# EAGLE board gnublin_ext_ssd1963 (EAGLE 6.3)
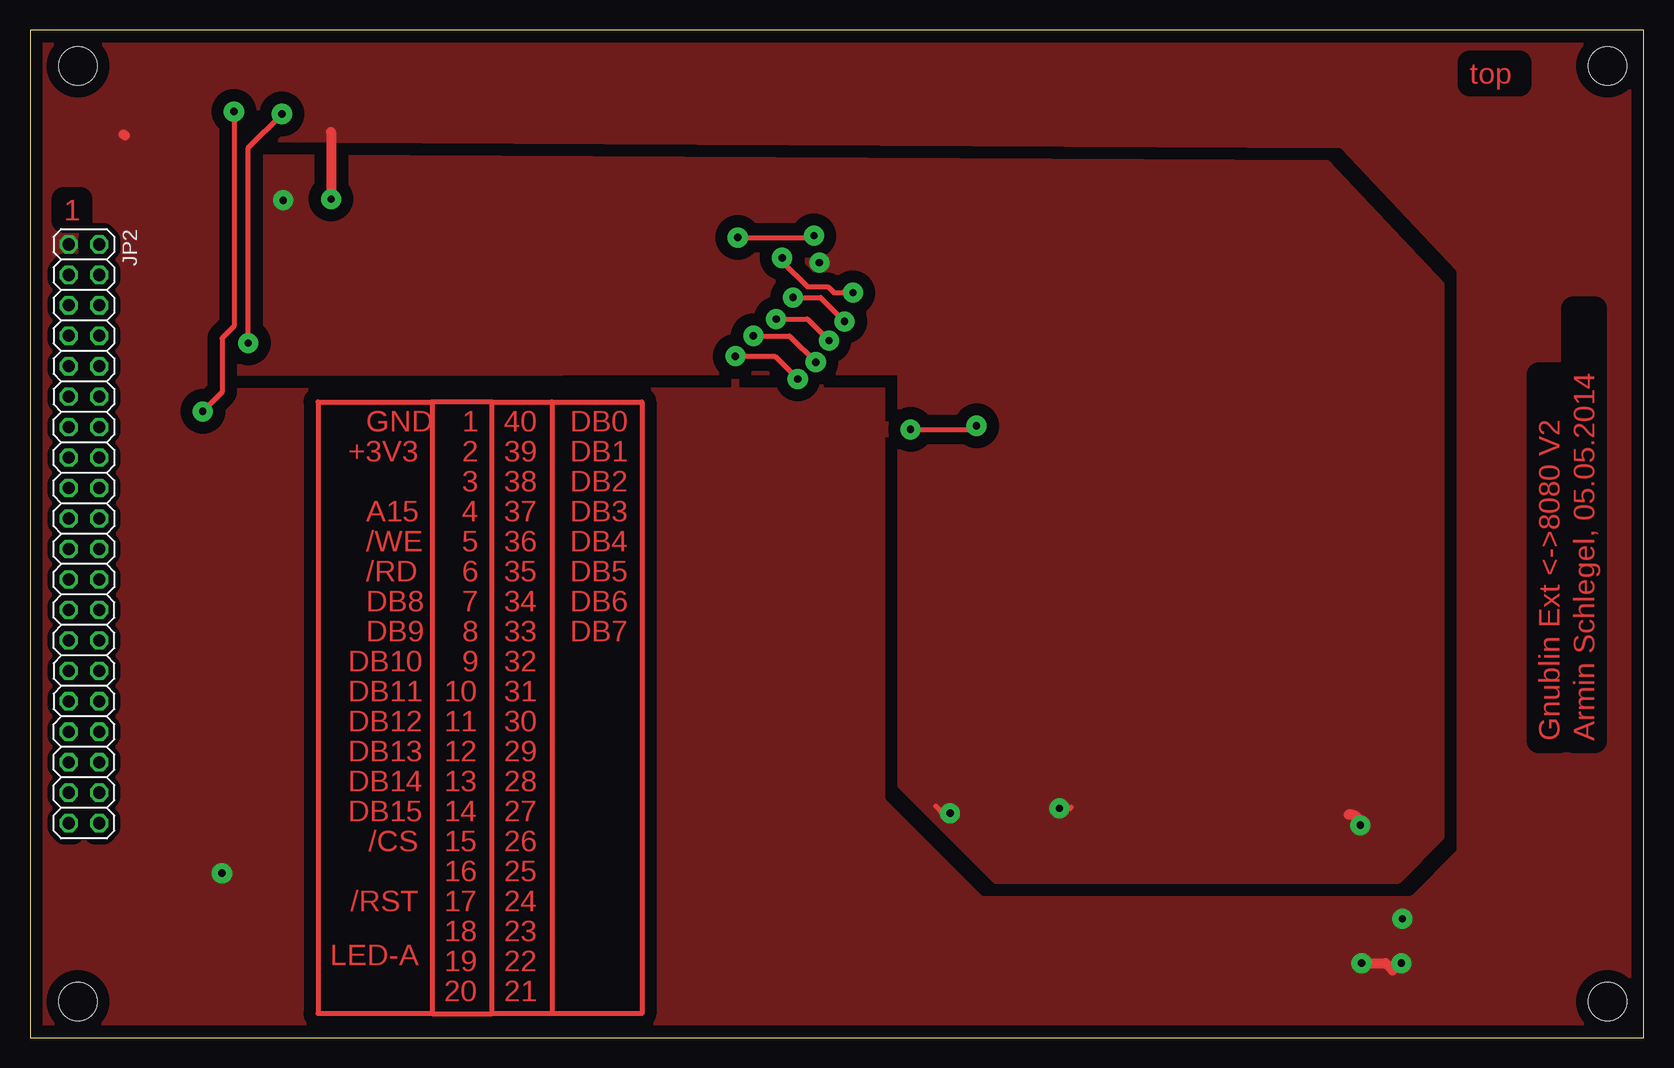
[diagram p0: board, top side]
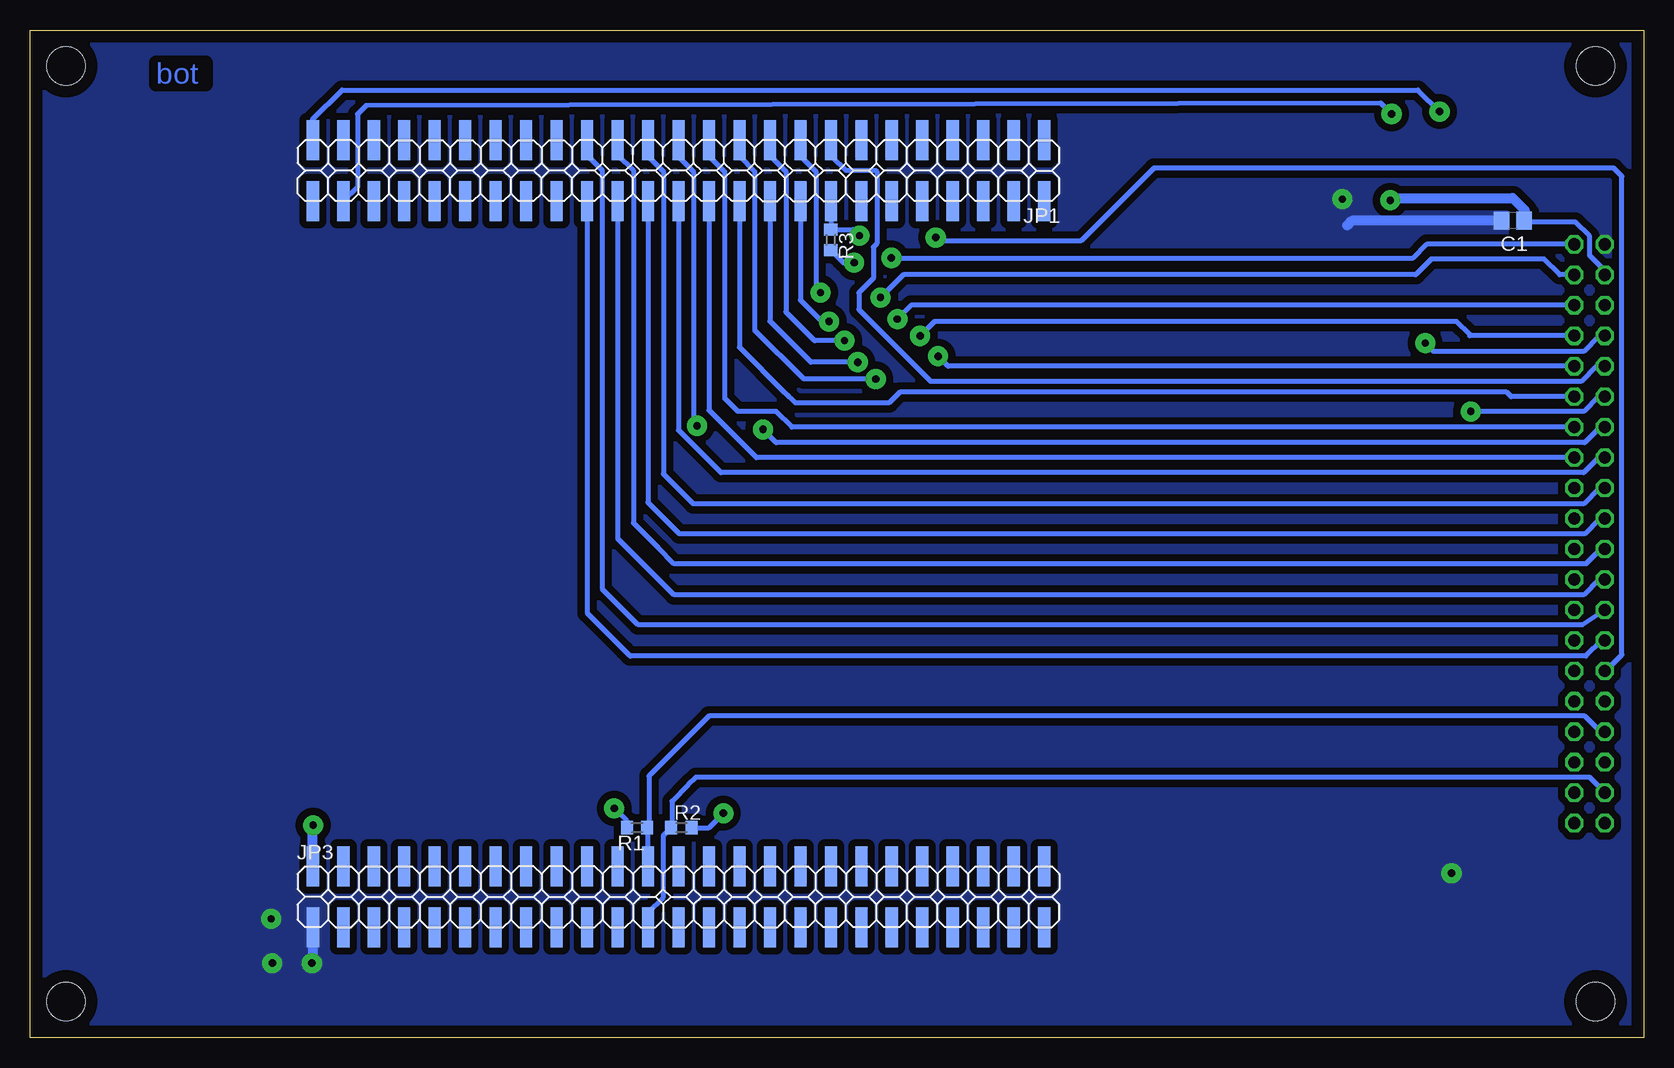
[diagram p1: board, bottom side, seen from below]

Size 134.5 x 84 mm. Coordinates in mm from the lower left corner, seen from the top.
Outline: 134.5,0 134.5,84 0,84 0,0 134.5,0
Copper layers (1*16): Top 0.035mm / dielectric 1.5mm / Bottom 0.035mm
Design rules "default": minimum track width 10mil, minimum drill 24mil, track to track 8mil, track to pad 8mil, pad to pad 8mil, via to via 8mil, smd to smd 8mil, copper to edge 40mil, drill to drill 8mil, minimum pad ring 10mil, minimum via ring 8mil, stop-mask expansion 4mil, vias tented up to drill 0mil, thermal gap 10mil
Net classes: 0 default: width 0.254 mm, drill 0.7 mm, clearance 0.254 mm
Holes 3.2 mm at 4,3 4,81 131.5,81 131.5,3

## Footprints (pad centres in the part's own frame; a part is rotated, then mirrored left to right if it is on the bottom)
C0805 = smd 1.3 x 1.5: 1 -0.95,0; 2 0.95,0
2X25SMD = smd 1.016 x 3.302: 1 -1.27,-3.81; 2 -1.27,1.27; 3 1.27,-3.81; 4 1.27,1.27; 5 3.81,-3.81; 6 3.81,1.27; 7 6.35,-3.81; 8 6.35,1.27; 9 8.89,-3.81; 10 8.89,1.27; 11 11.43,-3.81; 12 11.43,1.27; 13 13.97,-3.81; 14 13.97,1.27; 15 16.51,-3.81; 16 16.51,1.27; 17 19.05,-3.81; 18 19.05,1.27; 19 21.59,-3.81; 20 21.59,1.27; 21 24.13,-3.81; 22 24.13,1.27; 23 26.67,-3.81; 24 26.67,1.27; 25 29.21,-3.81; 26 29.21,1.27; 27 31.75,-3.81; 28 31.75,1.27; 29 34.29,-3.81; 30 34.29,1.27; 31 36.83,-3.81; 32 36.83,1.27; 33 39.37,-3.81; 34 39.37,1.27; 35 41.91,-3.81; 36 41.91,1.27; 37 44.45,-3.81; 38 44.45,1.27; 39 46.99,-3.81; 40 46.99,1.27; 41 49.53,-3.81; 42 49.53,1.27; 43 52.07,-3.81; 44 52.07,1.27; 45 54.61,-3.81; 46 54.61,1.27; 47 57.15,-3.81; 48 57.15,1.27; 49 59.69,-3.81; 50 59.69,1.27
2X20 = drill 1.016 octagon: 1 -24.13,-1.27; 2 -24.13,1.27; 3 -21.59,-1.27; 4 -21.59,1.27; 5 -19.05,-1.27; 6 -19.05,1.27; 7 -16.51,-1.27; 8 -16.51,1.27; 9 -13.97,-1.27; 10 -13.97,1.27; 11 -11.43,-1.27; 12 -11.43,1.27; 13 -8.89,-1.27; 14 -8.89,1.27; 15 -6.35,-1.27; 16 -6.35,1.27; 17 -3.81,-1.27; 18 -3.81,1.27; 19 -1.27,-1.27; 20 -1.27,1.27; 21 1.27,-1.27; 22 1.27,1.27; 23 3.81,-1.27; 24 3.81,1.27; 25 6.35,-1.27; 26 6.35,1.27; 27 8.89,-1.27; 28 8.89,1.27; 29 11.43,-1.27; 30 11.43,1.27; 31 13.97,-1.27; 32 13.97,1.27; 33 16.51,-1.27; 34 16.51,1.27; 35 19.05,-1.27; 36 19.05,1.27; 37 21.59,-1.27; 38 21.59,1.27; 39 24.13,-1.27; 40 24.13,1.27
R0603 = smd 1 x 1.1: 1 -0.85,0; 2 0.85,0

## Placement (x,y rotation side)
C1  100n  [C0805]  10.9,68.1 180 bottom
JP1  [2X25SMD]  51.23,71 180 bottom
JP2  [2X20]  4.5,42 270 top
JP3  [2X25SMD]  109.65,13 0 bottom
R1  10k  [R0603]  83.9,17.5 180 bottom
R2  10k  [R0603]  80.2,17.5 0 bottom
R3  10k  [R0603]  67.75,66.5 270 bottom

## Library data of the parts
C1 R1-R3 = rcl
JP1 JP3 = pinhead_smd
JP2 = pinhead

## Nets
+3V3: C1.1 JP2.3 JP3.2 R1.2 R2.2 R3.2
GND: C1.2 JP2.1 JP3.1
GPIO19: JP2.33 JP3.24 R1.1
GPIO20: JP2.37 JP3.23 R2.1
LPC_A15: JP1.48 JP2.7
LPC_DB0: JP1.17 JP2.2
LPC_DB1: JP1.18 JP2.4
LPC_DB2: JP1.19 JP2.6
LPC_DB3: JP1.20 JP2.8
LPC_DB4: JP1.21 JP2.10
LPC_DB5: JP1.22 JP2.12
LPC_DB6: JP1.23 JP2.14
LPC_DB7: JP1.24 JP2.16
LPC_DB8: JP1.25 JP2.13
LPC_DB9: JP1.26 JP2.15
LPC_DB10: JP1.27 JP2.17
LPC_DB11: JP1.28 JP2.19
LPC_DB12: JP1.29 JP2.21
LPC_DB13: JP1.30 JP2.23
LPC_DB14: JP1.31 JP2.25
LPC_DB15: JP1.32 JP2.27
LPC_DQM0: JP1.49 JP2.11
LPC_WE: JP1.15 JP2.9
STCS0: JP1.16 JP2.29 R3.1

## Tracks (layer width: path | path; a pad name or v marks a point on that pad's centre or on a via)
+3V3  (via drill 0.6 pad 1.68)
  Top 0.4: v76.7,18.7 76.1,18.7 75.5,19.3 | v85.8,19.1 86.7,19.1 86.8,19.2
  Top 0.813: v110.9,17.7 arc90 110,18.6 109.9,18.6
  Bottom 0.4: R3.2 67.2,65.1 66.9,64.8 66.7,64.6 v65.8,64.6 | R2.2 77.9,17.5 v76.7,18.7 | R1.2 84.75,18.05 v85.8,19.1
  Bottom 0.406: JP2.3 3.23,63.93 4.5,65.2 4.5,66.8 5.7,68 9.85,68 C1.1
  Bottom 0.813: JP3.2 110.92,17.68 v110.9,17.7 | v21.1,69.8 arc90 20.9,70 10.9,70 9.9,69 9.9,68.15 C1.1
  pour Top (isolate 1.016, rank 2, no thermals): 114,13 80.5,13 72.5,21 72.5,55.4 16.3,55.3 16.3,73.5 108.1,73 117.7,62.8 117.7,16.7
GND  (via drill 0.6 pad 1.68)
  Top 0.813: v111,6.2 113,6.2 113.6,5.6 | 7.9,75.2 7.8,75.3 | 25.1,75.5 v25.1,69.9
  Bottom 0.813: JP3.1 110.92,6.28 v111,6.2 | C1.2 24.3,68.1 24.7,67.7
  other vias: 114.4,9.9 114.3,6.2 16,13.7
  pour Bottom (isolate 0.61, no thermals): -0.17,-0.23 -0.17,83.54 134.71,84.64 134.71,-0.13
  pour Top (isolate 1.016, rank 3, no thermals): -1.37,-1.13 -1.97,84.94 135.51,84.74 134.41,0.07
GPIO19
  Bottom 0.406: JP3.24 82.98,17.43 R1.1 82.9,17.65 82.9,21.8 77.9,26.8 4.9,26.8 3.73,25.63 JP2.33
GPIO20
  Bottom 0.4: JP2.37 3.23,20.43 4.5,21.7 79,21.7 79.65,21.05
  Bottom 0.406: JP3.23 82.98,10.42 81.7,11.7 81.7,16.85 R2.1 81,17.55 81,19.7 79.65,21.05
LPC_A15  (via drill 0.6 pad 1.68)
  Top 0.406: v18.2,57.9 18.2,74.2 v21,77
  Bottom 0.406: JP2.7 3.73,58.47 5,57.2 17.5,57.2 v18.2,57.9 | v21,77 21.9,77.9 106.5,77.7 107.2,77 107.2,70.91 JP1.48
LPC_DB0  (via drill 0.6 pad 1.68)
  Top 0.4: v62.7,65 62.7,64.7 64.8,62.6 66.5,62.6 67,62.1 67.7,62.1
  Top 0.406: v68.6,62.1 67.7,62.1
  Bottom 0.406: JP1.17 70.28,73.48 69,72.2 69,62.5 v68.6,62.1 | JP2.2 18.07,66.13 19.2,65 v62.7,65
LPC_DB1  (via drill 0.6 pad 1.68)
  Top 0.406: v63.6,61.7 65.9,61.7 v67.9,59.7
  Bottom 0.406: JP1.18 70.28,61.48 68.5,59.7 v67.9,59.7 | v63.6,61.7 61.7,63.6 19,63.6 17.7,64.9 8.3,64.9 6.99,63.59 JP2.4
LPC_DB2  (via drill 0.6 pad 1.68)
  Top 0.406: v62.2,59.9 64.8,59.9 v66.6,58.1
  Bottom 0.406: JP1.19 72.82,73.52 71.5,72.2 71.5,60.5 69.1,58.1 v66.6,58.1 | JP2.6 61.05,61.05 v62.2,59.9
LPC_DB3  (via drill 0.6 pad 1.68)
  Top 0.406: v60.3,58.5 63.3,58.5 v65.5,56.3
  Bottom 0.406: JP1.20 72.82,59.72 69.4,56.3 v65.5,56.3 | JP2.8 14.49,58.51 14.49,58.59 15.6,59.7 59.1,59.7 v60.3,58.5
LPC_DB4  (via drill 0.6 pad 1.68)
  Top 0.406: v58.8,56.8 62.1,56.8 v64,54.9
  Bottom 0.406: JP1.21 75.36,73.46 74.1,72.2 74.1,59 70,54.9 v64,54.9 | JP2.10 57.97,55.97 v58.8,56.8
LPC_DB5
  Bottom 0.4: JP2.12 11.03,53.43 11.4,53.8 62,53.8 62.9,52.9 70.7,52.9 71.55,53.75
  Bottom 0.406: JP1.22 75.36,57.56 71.55,53.75 71.23,53.43
LPC_DB6
  Bottom 0.406: JP1.23 77.9,73.5 76.6,72.2 76.6,53.3 75.5,52.2 72.3,52.2 70.99,50.89 JP2.14
LPC_DB7
  Bottom 0.406: JP1.24 77.9,52.3 73.95,48.35 JP2.16
LPC_DB8  (via drill 0.6 pad 1.68)
  Top 0.406: v73.4,50.7 78.6,50.7 v78.9,51
  Bottom 0.406: JP1.25 80.44,73.44 79.2,72.2 79.2,51.3 v78.9,51 | JP2.13 3.73,50.77 4.9,49.6 72.3,49.6 v73.4,50.7
LPC_DB9
  Bottom 0.406: JP1.26 80.44,50.64 76.9,47.1 5,47.1 3.75,48.35 JP2.15
LPC_DB10
  Bottom 0.406: JP1.27 82.98,73.48 81.7,72.2 81.7,47 79.2,44.5 5,44.5 3.73,45.77 JP2.17
LPC_DB11
  Bottom 0.406: JP1.28 82.98,44.62 80.36,42 4.9,42 3.73,43.17 JP2.19
LPC_DB12
  Bottom 0.4: JP2.21 3.57,40.73 4.8,39.5 80.8,39.5 82.1,40.8
  Bottom 0.406: JP1.29 85.52,73.62 84.2,72.3 84.2,42.9 82.1,40.8
LPC_DB13
  Bottom 0.406: JP1.30 85.52,41.62 80.8,36.9 5,36.9 3.73,38.17 JP2.23
LPC_DB14
  Bottom 0.406: JP1.31 88.06,73.56 86.8,72.3 86.8,37.4 83.8,34.4 5.1,34.4 JP2.25
LPC_DB15
  Bottom 0.4: JP2.27 3.49,33.11 4.8,31.8 84.46,31.8 84.93,32.27
  Bottom 0.406: JP1.32 88.06,35.4 84.93,32.27 84.56,31.9
LPC_DQM0  (via drill 0.6 pad 1.68)
  Top 0.406: v17,77.2 17,59.3 16,58.3 16,53.8 v14.4,52.2
  Bottom 0.406: JP2.11 3.77,53.43 5,52.2 v14.4,52.2 | JP1.49 110.92,76.58 108.5,79 18.8,79 v17,77.2
LPC_WE
  Bottom 0.4: 63.9,72.2 63.9,66.2 64.2,65.9 64.2,63.3 65.4,62.1
  Bottom 0.406: JP1.15 67.74,73.44 67.64,73.44 66.5,72.3 64,72.3 63.9,72.2 | JP2.9 3.93,55.97 5.2,54.7 59.4,54.7 65.4,60.7 65.4,62.1
N$1
  Top 0.4: 33.5,2 38.5,2 38.5,53 33.5,53 | 33.5,53 24,53 24,2 33.5,2 | 33.5,53 33.5,2
N$2
  Top 0.4: 43.5,53 43.5,2 | 43.5,2 38.5,2 38.5,53 43.5,53 | 43.5,53 51,53 51,2 43.5,2
STCS0  (via drill 0.6 pad 1.68)
  Top 0.406: v59,66.7 65.2,66.7 v65.35,66.85
  Bottom 0.406: JP2.29 3.13,30.57 1.8,31.9 1.8,71.8 2.5,72.5 40.8,72.5 46.9,66.4 58.7,66.4 v59,66.7 | JP1.16 R3.1 | R3.1 | R3.1 65.86,67.36 v65.35,66.85

## Text on the board
Top: top | 1 | GND | 1 | 40 | DB0 | +3V3 | 2 | 39 | DB1 | 3 | 38 | DB2 | A15 | 4 | 37 | DB3 | /WE | 5 | 36 | DB4 | /RD | 6 | 35 | DB5 | DB8 | 7 | 34 | DB6 | DB9 | 8 | 33 | DB7 | DB10 | 9 | 32 | DB11 | 10 | 31 | DB12 | 11 | 30 | Gnublin Ext <->8080 V2 | Armin Schlegel, 05.05.2014 | DB13 | 12 | 29 | DB14 | 13 | 28 | DB15 | 14 | 27 | /CS | 15 | 26 | 16 | 25 | /RST | 17 | 24 | 18 | 23 | LED-A | 19 | 22 | 20 | 21
Bottom: bot